# Altium PCB Insole_ver1_42.PcbDoc (part 2 of 3)
Units mm, origin at the board's own origin, x right, y up, seen from the top; angles counter-clockwise.
Board outline 154.9 x 260.57 mm, 2 copper layers (Top Layer, Bottom Layer); 254 components, 50 nets, 803 pads, 0 vias.
Unrouted connection lines stored in the file: 477.
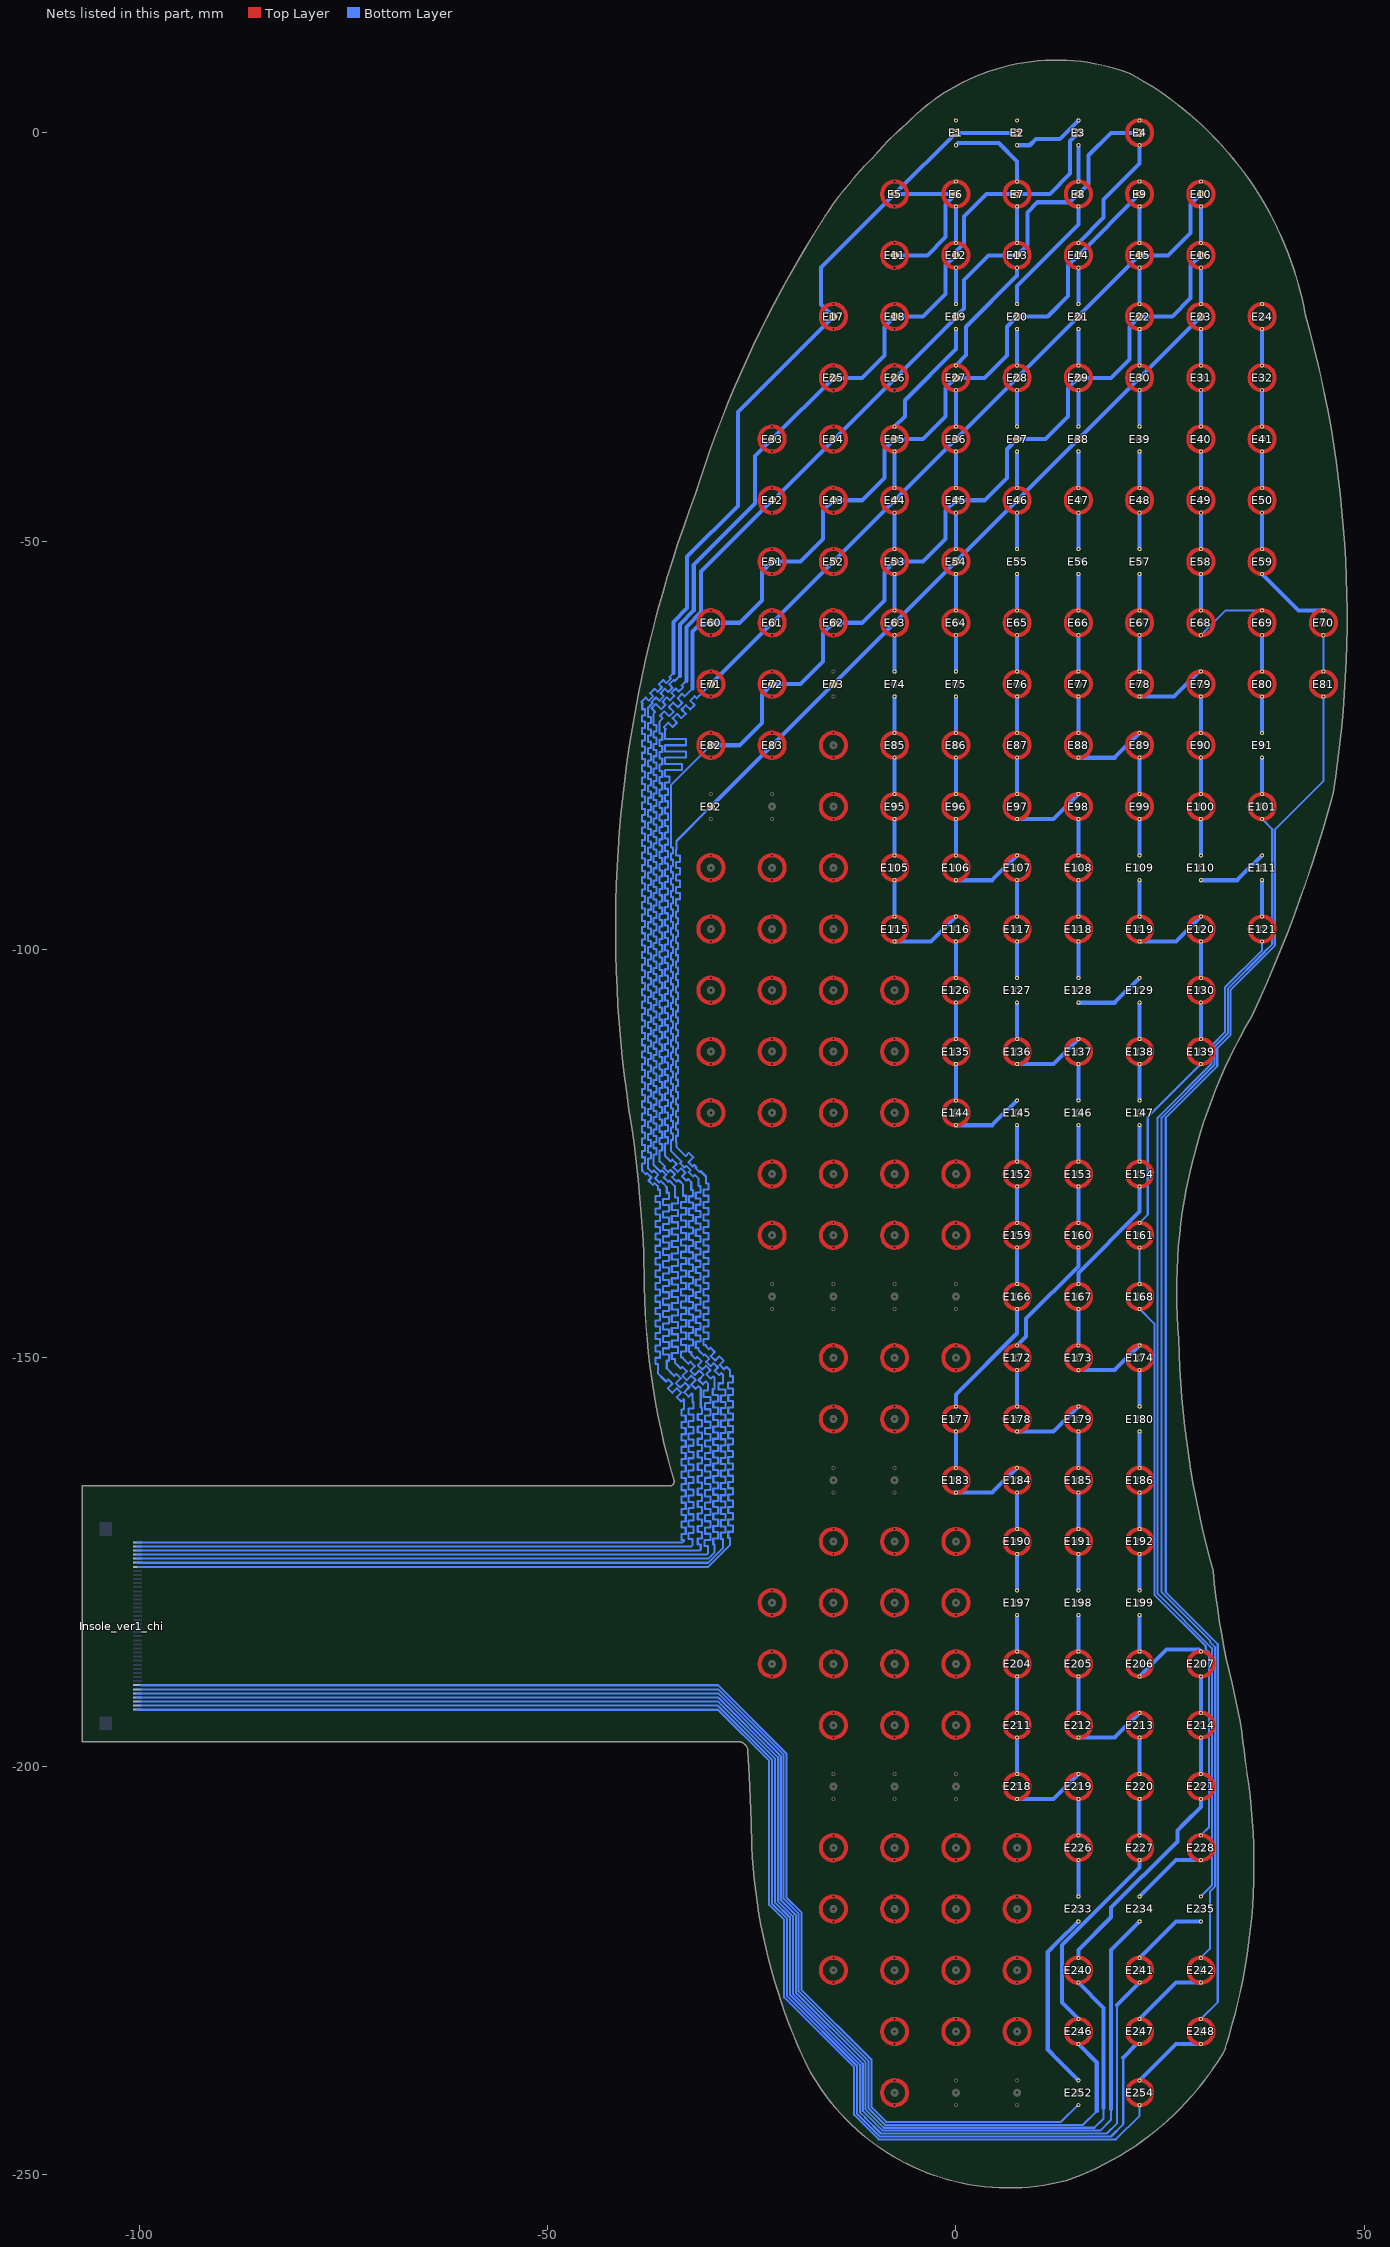
[diagram p2: the nets of this part, all layers, seen from the top]

## Nets (pads, with @x,y where several pads share a name; then routed paths per layer and width w, separated by ;. In a path a pad name is that pad's centre, name@x,y a point inside that pad or via, vN(x,y) a via of type N, cw(c..) or ccw(c..) an arc to the next point about the centre after c; other vN are vias at no path point) (continued)
Col4: E6.1 E12.1 E19.1 E35.1 E44.1 E53.1 E63.1 E74.1 E85.1 E95.1 E105.1 E115.1 E116.1 E126.1 E135.1 E144.1 E145.1 E152.1 E159.1 E166.1 E177.1 E183.1 E184.1 E190.1 E197.1 E204.1 E211.1 E218.1 E219.1 E226.1 E233.1 E252.1 Insole_ver1_chi.36 | length 351.6
  Bottom Layer w0.254: Insole_ver1_chi.36@-99.777,-190.1 -29.109,-190.1 -20.736,-198.473 -20.736,-216.102 -18.889,-217.949 -18.889,-227.431 -10.322,-235.998 -10.322,-241.789 -8.534,-243.577 12.88,-243.577 14.933,-241.524 E252.1@15,-241.524
  Bottom Layer w0.5: E115.1@-7.5,-99.024 -3.048,-99.024 E116.1@0,-95.976 ; E115.1@-7.5,-95.976 E105.1@-7.5,-91.524 ; E105.1@-7.5,-88.476 E95.1@-7.5,-84.024 ; E95.1@-7.5,-80.976 E85.1@-7.5,-76.524 ; E85.1@-7.5,-73.476 E74.1@-7.5,-69.024 ; E74.1@-7.5,-65.976 E63.1@-7.5,-61.524 ; E63.1@-7.5,-58.476 E53.1@-7.5,-54.024 ; E53.1@-7.5,-50.976 E44.1@-7.5,-46.524 ; E44.1@-7.5,-43.476 E35.1@-7.5,-39.024 ; E35.1@-7.5,-35.976 -6.25,-34.726 -6.25,-32.75 0,-26.5 E19.1@0,-24.024 ; E183.1@0,-166.524 4.452,-166.524 E184.1@7.5,-163.476 ; E183.1@0,-163.476 E177.1@0,-159.024 ; E177.1@0,-155.976 0,-154.5 7.5,-147 E166.1@7.5,-144.024 ; E144.1@0,-121.524 4.452,-121.524 E145.1@7.5,-118.476 ; E144.1@0,-118.476 E135.1@0,-114.024 ; E135.1@0,-110.976 E126.1@0,-106.524 ; E126.1@0,-103.476 E116.1@0,-99.024 ; E19.1@0,-20.976 E12.1@0,-16.524 ; E12.1@0,-13.476 E6.1@0,-9.024 ; E218.1@7.5,-204.024 11.952,-204.024 E219.1@15,-200.976 ; E218.1@7.5,-200.976 E211.1@7.5,-196.524 ; E211.1@7.5,-193.476 E204.1@7.5,-189.024 ; E204.1@7.5,-185.976 E197.1@7.5,-181.524 ; E197.1@7.5,-178.476 E190.1@7.5,-174.024 ; E190.1@7.5,-170.976 E184.1@7.5,-166.524 ; E166.1@7.5,-140.976 E159.1@7.5,-136.524 ; E159.1@7.5,-133.476 E152.1@7.5,-129.024 ; E152.1@7.5,-125.976 E145.1@7.5,-121.524 ; E252.1@15,-238.476 12.4,-235.876 11.25,-234.726 11.25,-222.774 12.4,-221.624 E233.1@15,-219.024 ; E233.1@15,-215.976 E226.1@15,-211.524 ; E226.1@15,-208.476 E219.1@15,-204.024
Col5: E1.1 E7.1 E13.1 E27.1 E36.1 E45.1 E54.1 E64.1 E75.1 E86.1 E96.1 E106.1 E107.1 E117.1 E127.1 E136.1 E137.1 E146.1 E153.1 E160.1 E172.1 E178.1 E179.1 E185.1 E191.1 E198.1 E205.1 E212.1 E213.1 E220.1 E227.1 E246.1 Insole_ver1_chi.37 | length 371
  Bottom Layer w0.254: Insole_ver1_chi.37@-99.777,-190.6 -99.303,-190.6 -99.297,-190.606 -29.106,-190.606 -21.092,-198.62 -21.092,-216.249 -19.245,-218.096 -19.245,-227.578 -10.686,-236.137 -10.686,-241.928 -8.681,-243.933 15.567,-243.933 17.25,-242.25
  Bottom Layer w0.5: E106.1@0,-91.524 4.452,-91.524 E107.1@7.5,-88.476 ; E106.1@0,-88.476 E96.1@0,-84.024 ; E96.1@0,-80.976 E86.1@0,-76.524 ; E86.1@0,-73.476 E75.1@0,-69.024 ; E75.1@0,-65.976 E64.1@0,-61.524 ; E64.1@0,-58.476 E54.1@0,-54.024 ; E54.1@0,-50.976 E45.1@0,-46.524 ; E45.1@0,-43.476 E36.1@0,-39.024 ; E36.1@0,-35.976 E27.1@0,-31.524 ; E27.1@0,-28.476 1.25,-27.226 1.25,-23.75 7.5,-17.5 E13.1@7.5,-16.524 ; E1.1@0,-1.524 0.274,-1.25 5.25,-1.25 7.5,-3.5 E7.1@7.5,-5.976 ; E178.1@7.5,-159.024 11.952,-159.024 E179.1@15,-155.976 ; E178.1@7.5,-155.976 E172.1@7.5,-151.524 ; E172.1@7.5,-148.476 8.6,-147.376 8.6,-145.2 15,-138.8 E160.1@15,-136.524 ; E136.1@7.5,-114.024 11.952,-114.024 E137.1@15,-110.976 ; E136.1@7.5,-110.976 E127.1@7.5,-106.524 ; E127.1@7.5,-103.476 E117.1@7.5,-99.024 ; E117.1@7.5,-95.976 E107.1@7.5,-91.524 ; E13.1@7.5,-13.476 E7.1@7.5,-9.024 ; E246.1@15,-234.024 17.25,-236.274 17.25,-242.25 ; E246.1@15,-230.976 13,-228.976 13,-221.916 22.5,-212.416 E227.1@22.5,-211.524 ; E212.1@15,-196.524 19.452,-196.524 E213.1@22.5,-193.476 ; E212.1@15,-193.476 E205.1@15,-189.024 ; E205.1@15,-185.976 E198.1@15,-181.524 ; E198.1@15,-178.476 E191.1@15,-174.024 ; E191.1@15,-170.976 E185.1@15,-166.524 ; E185.1@15,-163.476 E179.1@15,-159.024 ; E160.1@15,-133.476 E153.1@15,-129.024 ; E153.1@15,-125.976 E146.1@15,-121.524 ; E146.1@15,-118.476 E137.1@15,-114.024 ; E227.1@22.5,-208.476 E220.1@22.5,-204.024 ; E220.1@22.5,-200.976 E213.1@22.5,-196.524
Col6: E2.1 E3.1 E8.1 E20.1 E28.1 E37.1 E46.1 E55.1 E65.1 E76.1 E87.1 E97.1 E98.1 E108.1 E118.1 E128.1 E129.1 E138.1 E147.1 E154.1 E167.1 E173.1 E174.1 E180.1 E186.1 E192.1 E199.1 E206.1 E207.1 E214.1 E221.1 E240.1 Insole_ver1_chi.38 | length 380.2
  Bottom Layer w0.254: Insole_ver1_chi.38@-100.2,-191.1 -29.114,-191.1 -21.447,-198.767 -21.447,-216.397 -19.6,-218.243 -19.6,-227.726 -11.042,-236.284 -11.042,-242.076 -8.829,-244.289 16.961,-244.289 18.1,-243.15 18.1,-241.85 ; 27,-185.774 27,-185.75
  Bottom Layer w0.5: E97.1@7.5,-84.024 11.952,-84.024 E98.1@15,-80.976 ; E97.1@7.5,-80.976 E87.1@7.5,-76.524 ; E87.1@7.5,-73.476 E76.1@7.5,-69.024 ; E76.1@7.5,-65.976 E65.1@7.5,-61.524 ; E65.1@7.5,-58.476 E55.1@7.5,-54.024 ; E55.1@7.5,-50.976 E46.1@7.5,-46.524 ; E46.1@7.5,-43.476 E37.1@7.5,-39.024 ; E37.1@7.5,-35.976 E28.1@7.5,-31.524 ; E28.1@7.5,-28.476 E20.1@7.5,-24.024 ; E20.1@7.5,-20.976 7.5,-18.75 15,-11.25 E8.1@15,-9.024 ; E2.1@7.5,-1.524 9.048,-1.524 9.822,-0.75 12.726,-0.75 E3.1@15,1.524 ; E240.1@15,-226.524 18.1,-229.624 18.1,-241.85 ; E240.1@15,-223.476 15,-222.5 18.989,-218.511 18.989,-217.311 22.9,-213.4 22.982,-213.4 27.118,-209.265 27.118,-207.882 28,-207 30,-205 E221.1@30,-204.024 ; E173.1@15,-151.524 19.452,-151.524 E174.1@22.5,-148.476 ; E173.1@15,-148.476 E167.1@15,-144.024 ; E167.1@15,-140.976 15,-139.6 22.5,-132.1 E154.1@22.5,-129.024 ; E128.1@15,-106.524 19.452,-106.524 E129.1@22.5,-103.476 ; E128.1@15,-103.476 E118.1@15,-99.024 ; E118.1@15,-95.976 E108.1@15,-91.524 ; E108.1@15,-88.476 E98.1@15,-84.024 ; E8.1@15,-5.976 E3.1@15,-1.524 ; E206.1@22.5,-189.024 25.774,-185.75 27,-185.75 29.774,-185.75 E207.1@30,-185.976 ; E206.1@22.5,-185.976 E199.1@22.5,-181.524 ; E199.1@22.5,-178.476 E192.1@22.5,-174.024 ; E192.1@22.5,-170.976 E186.1@22.5,-166.524 ; E186.1@22.5,-163.476 E180.1@22.5,-159.024 ; E180.1@22.5,-155.976 E174.1@22.5,-151.524 ; E154.1@22.5,-125.976 E147.1@22.5,-121.524 ; E147.1@22.5,-118.476 E138.1@22.5,-114.024 ; E138.1@22.5,-110.976 E129.1@22.5,-106.524 ; E221.1@30,-200.976 E214.1@30,-196.524 ; E214.1@30,-193.476 E207.1@30,-189.024
Col7: E4.1 E14.1 E21.1 E29.1 E38.1 E47.1 E56.1 E66.1 E77.1 E88.1 E89.1 E99.1 E109.1 E119.1 E120.1 E130.1 E139.1 E161.1 E168.1 E228.1 E234.1 Insole_ver1_chi.39 | length 381.9
  Bottom Layer w0.254: Insole_ver1_chi.39@-100.2,-191.6 -29.117,-191.6 -21.803,-198.914 -21.803,-216.544 -19.956,-218.391 -19.956,-227.873 -11.4,-236.429 -11.4,-242.221 -8.976,-244.644 17.672,-244.644 19,-243.317 19,-242 ; E168.1@22.5,-144.024 24.3,-145.824 24.3,-179 30.6,-185.3 30.6,-185.684 31,-186.084 31,-207.476 E228.1@30,-208.476 ; E168.1@22.5,-140.976 E161.1@22.5,-136.524 ; E161.1@22.5,-133.476 23.5,-132.476 23.5,-120.524 E139.1@30,-114.024
  Bottom Layer w0.5: E88.1@15,-76.524 19.452,-76.524 E89.1@22.5,-73.476 ; E88.1@15,-73.476 E77.1@15,-69.024 ; E77.1@15,-65.976 E66.1@15,-61.524 ; E66.1@15,-58.476 E56.1@15,-54.024 ; E56.1@15,-50.976 E47.1@15,-46.524 ; E47.1@15,-43.476 E38.1@15,-39.024 ; E38.1@15,-35.976 E29.1@15,-31.524 ; E29.1@15,-28.476 E21.1@15,-24.024 ; E21.1@15,-20.976 E14.1@15,-16.524 ; E14.1@15,-13.476 18.1,-10.376 18.1,-8.15 22.5,-3.75 E4.1@22.5,-1.524 ; 19,-242 19,-222.524 E234.1@22.5,-219.024 ; E234.1@22.5,-215.976 26.952,-211.524 E228.1@30,-211.524 ; E119.1@22.5,-99.024 26.952,-99.024 E120.1@30,-95.976 ; E119.1@22.5,-95.976 E109.1@22.5,-91.524 ; E109.1@22.5,-88.476 E99.1@22.5,-84.024 ; E99.1@22.5,-80.976 E89.1@22.5,-76.524 ; E139.1@30,-110.976 E130.1@30,-106.524 ; E130.1@30,-103.476 E120.1@30,-99.024
Col8: E9.1 E15.1 E22.1 E30.1 E39.1 E48.1 E57.1 E67.1 E78.1 E79.1 E90.1 E100.1 E110.1 E111.1 E121.1 E235.1 E241.1 Insole_ver1_chi.40 | length 385.5
  Bottom Layer w0.254: Insole_ver1_chi.40@-99.777,-192.1 -99.325,-192.1 -29.12,-192.1 -22.158,-199.062 -22.158,-216.691 -20.312,-218.538 -20.312,-228.02 -11.755,-236.577 -11.755,-242.368 -11.1,-243.024 -11.1,-243.067 -9.167,-245 18.494,-245 19.75,-243.744 19.75,-229.274 ; E235.1@30,-215.976 31.356,-214.62 31.356,-185.553 24.7,-178.897 24.7,-120.6 31.3,-114 31.3,-111.797 32.944,-110.153 32.944,-104.656 37.5,-100.1 E121.1@37.5,-99.024
  Bottom Layer w0.5: 19.75,-229.274 E241.1@22.5,-226.524 ; E241.1@22.5,-223.476 26.952,-219.024 E235.1@30,-219.024 ; E78.1@22.5,-69.024 26.726,-69.024 29.774,-65.976 E79.1@30,-65.976 ; E78.1@22.5,-65.976 E67.1@22.5,-61.524 ; E67.1@22.5,-58.476 E57.1@22.5,-54.024 ; E57.1@22.5,-50.976 E48.1@22.5,-46.524 ; E48.1@22.5,-43.476 E39.1@22.5,-39.024 ; E39.1@22.5,-35.976 E30.1@22.5,-31.524 ; E30.1@22.5,-28.476 E22.1@22.5,-24.024 ; E22.1@22.5,-20.976 E15.1@22.5,-16.524 ; E15.1@22.5,-13.476 E9.1@22.5,-9.024 ; E110.1@30,-91.524 34.452,-91.524 E111.1@37.5,-88.476 ; E110.1@30,-88.476 E100.1@30,-84.024 ; E100.1@30,-80.976 E90.1@30,-76.524 ; E90.1@30,-73.476 E79.1@30,-69.024 ; E121.1@37.5,-95.976 E111.1@37.5,-91.524
Col9: E10.1 E16.1 E23.1 E31.1 E40.1 E49.1 E58.1 E68.1 E69.1 E80.1 E91.1 E101.1 E242.1 E247.1 Insole_ver1_chi.41 | length 384.5
  Bottom Layer w0.254: Insole_ver1_chi.41@-99.777,-192.6 -29.123,-192.6 -22.514,-199.209 -22.514,-216.838 -20.667,-218.685 -20.667,-228.168 -12.111,-236.724 -12.111,-242.559 -9.314,-245.355 18.995,-245.355 20.5,-243.85 20.5,-235.7 ; 22.146,-234.054 22.47,-234.054 E247.1@22.5,-234.024 ; E242.1@30,-223.476 31.1,-222.376 31.1,-215.379 31.711,-214.768 31.711,-185.405 31.1,-184.794 31.1,-184.6 25.2,-178.7 25.2,-120.603 31.656,-114.147 31.656,-111.944 33.3,-110.3 33.3,-104.803 37.856,-100.247 37.856,-100.244 38.744,-99.356 38.744,-85.268 E101.1@37.5,-84.024 ; E68.1@30,-61.524 33.048,-58.476 E69.1@37.5,-58.476
  Bottom Layer w0.5: 20.5,-235.7 22.146,-234.054 ; E247.1@22.5,-230.976 26.952,-226.524 E242.1@30,-226.524 ; E68.1@30,-58.476 E58.1@30,-54.024 ; E58.1@30,-50.976 E49.1@30,-46.524 ; E49.1@30,-43.476 E40.1@30,-39.024 ; E40.1@30,-35.976 E31.1@30,-31.524 ; E31.1@30,-28.476 E23.1@30,-24.024 ; E23.1@30,-20.976 E16.1@30,-16.524 ; E16.1@30,-13.476 E10.1@30,-9.024 ; E101.1@37.5,-80.976 E91.1@37.5,-76.524 ; E91.1@37.5,-73.476 E80.1@37.5,-69.024 ; E80.1@37.5,-65.976 E69.1@37.5,-61.524
Col10: E24.1 E32.1 E41.1 E50.1 E59.1 E70.1 E81.1 E248.1 E254.1 Insole_ver1_chi.42 | length 380.7
  Bottom Layer w0.254: Insole_ver1_chi.42@-100.2,-193.1 -29.126,-193.1 -22.87,-199.356 -22.87,-216.986 -21.023,-218.833 -21.023,-228.315 -12.466,-236.871 -12.466,-242.706 -9.462,-245.711 19.589,-245.711 22.5,-242.8 E254.1@22.5,-241.524 ; E248.1@30,-230.976 32.067,-228.909 32.067,-185.064 25.7,-178.697 25.7,-120.606 32.011,-114.295 32.011,-112.092 33.656,-110.447 33.656,-104.95 39.1,-99.506 39.1,-85.3 45,-79.4 E81.1@45,-69.024 ; E81.1@45,-65.976 E70.1@45,-61.524
  Bottom Layer w0.5: E254.1@22.5,-238.476 26.952,-234.024 E248.1@30,-234.024 ; E59.1@37.5,-54.024 41.952,-58.476 E70.1@45,-58.476 ; E59.1@37.5,-50.976 E50.1@37.5,-46.524 ; E50.1@37.5,-43.476 E41.1@37.5,-39.024 ; E41.1@37.5,-35.976 E32.1@37.5,-31.524 ; E32.1@37.5,-28.476 E24.1@37.5,-24.024
Col11: 
Col12: 
Col13: 
Col14: 
Col15: 
Col16: 
Col17: 
Col18: 
Row1: E1.0 E2.0 E5.0 E6.0 E11.0 E17.0 Insole_ver1_chi.1 | length 346.8
  Bottom Layer w0.254: Insole_ver1_chi.1@-100.2,-172.6 -98.97,-172.6 -33.449,-172.6 -33.3,-172.451 -33.3,-172.324 -33.6,-172.324 -33.6,-171.562 -33.079,-171.562 -33.079,-170.8 -33.6,-170.8 -33.6,-170.038 -33.079,-170.038 -33.079,-169.276 -33.6,-169.276 -33.6,-168.514 -33.079,-168.514 -33.079,-167.752 -33.6,-167.752 -33.6,-166.99 -33.079,-166.99 -33.079,-166.228 -33.6,-166.228 -33.6,-165.466 -33.079,-165.466 -33.079,-164.704 -33.6,-164.704 -33.6,-163.942 -33.079,-163.942 -33.079,-163.18 -33.6,-163.18 -33.6,-162.418 -33.079,-162.418 -33.079,-161.656 -33.6,-161.656 -33.6,-160.894 -33.079,-160.894 -33.079,-160.132 -33.6,-160.132 -33.6,-159.37 -33.079,-159.37 -33.079,-158.608 -33.6,-158.608 -33.6,-157.846 -33.079,-157.846 -33.079,-157.084 -33.6,-157.084 -33.6,-156.322 -33.3,-156.322 -33.3,-155.7 -33.3,-155.2 -33.3,-155.1 -33.34,-155.06 -33.643,-155.363 -34.182,-154.825 -33.625,-154.268 -34.164,-153.729 -34.721,-154.286 -35.26,-153.747 -34.703,-153.19 -35.241,-152.651 -35.495,-152.905 -35.8,-152.6 -36.5,-151.9 -36.5,-151.619 -36.5,-150.763 -36.763,-150.763 -36.763,-150.001 -36.229,-150.001 -36.229,-149.239 -36.763,-149.239 -36.763,-148.477 -36.229,-148.477 -36.229,-147.715 -36.763,-147.715 -36.763,-146.953 -36.229,-146.953 -36.229,-146.191 -36.763,-146.191 -36.763,-145.429 -36.229,-145.429 -36.229,-144.667 -36.763,-144.667 -36.763,-143.905 -36.229,-143.905 -36.229,-143.143 -36.763,-143.143 -36.763,-142.381 -36.229,-142.381 -36.229,-141.619 -36.763,-141.619 -36.763,-140.857 -36.229,-140.857 -36.229,-140.095 -36.763,-140.095 -36.763,-139.333 -36.229,-139.333 -36.229,-138.571 -36.763,-138.571 -36.763,-137.809 -36.229,-137.809 -36.229,-137.047 -36.763,-137.047 -36.763,-136.285 -36.229,-136.285 -36.229,-135.523 -36.763,-135.523 -36.763,-134.761 -36.229,-134.761 -36.229,-133.999 -36.763,-133.999 -36.763,-133.237 -36.229,-133.237 -36.229,-132.475 -36.763,-132.475 -36.763,-131.713 -36.229,-131.713 -36.229,-130.951 -36.763,-130.951 -36.763,-130.189 -36.229,-130.189 -36.229,-129.427 -36.5,-129.427 -36.5,-129.3 -36.5,-129 -36.57,-128.93 -36.883,-128.617 -37.095,-128.83 -37.634,-128.291 -37.267,-127.924 -37.806,-127.385 -37.96,-127.54 -38.05,-127.45 -38.4,-127.1 -38.4,-126.973 -38.417,-126.973 -38.417,-126.211 -38.056,-126.211 -38.056,-125.449 -38.417,-125.449 -38.417,-124.687 -38.056,-124.687 -38.056,-123.925 -38.417,-123.925 -38.417,-123.163 -38.056,-123.163 -38.056,-122.401 -38.417,-122.401 -38.417,-121.639 -38.056,-121.639 -38.056,-120.877 -38.417,-120.877 -38.417,-120.115 -38.056,-120.115 -38.056,-119.353 -38.417,-119.353 -38.417,-118.591 -38.056,-118.591 -38.056,-117.829 -38.417,-117.829 -38.417,-117.067 -38.056,-117.067 -38.056,-116.305 -38.417,-116.305 -38.417,-115.543 -38.056,-115.543 -38.056,-114.781 -38.417,-114.781 -38.417,-114.019 -38.056,-114.019 -38.056,-113.257 -38.417,-113.257 -38.417,-112.495 -38.056,-112.495 -38.056,-111.733 -38.417,-111.733 -38.417,-110.971 -38.056,-110.971 -38.056,-110.209 -38.417,-110.209 -38.417,-109.447 -38.056,-109.447 -38.056,-108.685 -38.417,-108.685 -38.417,-107.923 -38.056,-107.923 -38.056,-107.161 -38.417,-107.161 -38.417,-106.399 -38.056,-106.399 -38.056,-105.637 -38.417,-105.637 -38.417,-104.875 -38.056,-104.875 -38.056,-104.113 -38.417,-104.113 -38.417,-103.351 -38.056,-103.351 -38.056,-102.589 -38.417,-102.589 -38.417,-101.827 -38.056,-101.827 -38.056,-101.065 -38.417,-101.065 -38.417,-100.303 -38.056,-100.303 -38.056,-99.541 -38.417,-99.541 -38.417,-98.779 -38.056,-98.779 -38.056,-98.017 -38.417,-98.017 -38.417,-97.255 -38.056,-97.255 -38.056,-96.493 -38.417,-96.493 -38.417,-95.731 -38.056,-95.731 -38.056,-94.969 -38.417,-94.969 -38.417,-94.207 -38.056,-94.207 -38.056,-93.445 -38.417,-93.445 -38.417,-92.683 -38.056,-92.683 -38.056,-91.921 -38.417,-91.921 -38.417,-91.159 -38.056,-91.159 -38.056,-90.397 -38.417,-90.397 -38.417,-89.635 -38.056,-89.635 -38.056,-88.873 -38.417,-88.873 -38.417,-88.111 -38.056,-88.111 -38.056,-87.349 -38.417,-87.349 -38.417,-86.587 -38.056,-86.587 -38.056,-85.825 -38.417,-85.825 -38.417,-85.063 -38.056,-85.063 -38.056,-84.301 -38.417,-84.301 -38.417,-83.539 -38.056,-83.539 -38.056,-82.777 -38.417,-82.777 -38.417,-82.015 -38.056,-82.015 -38.056,-81.253 -38.417,-81.253 -38.417,-80.491 -38.056,-80.491 -38.056,-79.729 -38.417,-79.729 -38.417,-78.967 -38.056,-78.967 -38.056,-78.205 -38.417,-78.205 -38.417,-77.443 -38.056,-77.443 -38.056,-76.681 -38.417,-76.681 -38.417,-75.919 -38.056,-75.919 -38.056,-75.157 -38.417,-75.157 -38.417,-74.395 -38.056,-74.395 -38.056,-73.633 -38.417,-73.633 -38.417,-72.871 -38.056,-72.871 -38.056,-72.109 -38.417,-72.109 -38.417,-71.347 -38.056,-71.347 -38.056,-70.585 -38.4,-70.585 -38.4,-70.2 -38.4,-70 -38.4,-69.972 -38.324,-69.896 -38.517,-69.704 -37.978,-69.165 -37.603,-69.54 -37.064,-69.001 -37.439,-68.626 -36.9,-68.087 -36.525,-68.462 -35.987,-67.923 -36.361,-67.549 -35.822,-67.01 -35.448,-67.384 -34.909,-66.846 -35.091,-66.663 -34.6,-66.172 -34.6,-66.123
  Bottom Layer w0.5: -34.6,-66.172 -34.6,-59.9 -32.9,-58.2 -32.9,-51.9 -26.7,-45.7 -26.7,-34.2 E17.0@-15,-22.5 -16.5,-21 -16.5,-16.5 E5.0@-7.5,-7.5 E1.0@0,0 E2.0@7.5,0 ; E11.0@-7.5,-15 -3.5,-15 -1.25,-12.75 -1.25,-8.75 E6.0@0,-7.5
  Bottom Layer w0.508: E5.0@-7.5,-7.5 E6.0@0,-7.5
Row2: E3.0 E7.0 E12.0 E18.0 E25.0 E33.0 Insole_ver1_chi.2 | length 338.8
  Bottom Layer w0.254: Insole_ver1_chi.2@-100.2,-173.1 -98.97,-173.1 -32.385,-173.1 -32.236,-172.951 -32.236,-172.336 -32.236,-172.209 -32.724,-172.209 -32.724,-171.447 -32.102,-171.447 -32.102,-170.685 -32.724,-170.685 -32.724,-169.923 -32.102,-169.923 -32.102,-169.161 -32.724,-169.161 -32.724,-168.399 -32.102,-168.399 -32.102,-167.637 -32.724,-167.637 -32.724,-166.875 -32.102,-166.875 -32.102,-166.113 -32.724,-166.113 -32.724,-165.351 -32.102,-165.351 -32.102,-164.589 -32.724,-164.589 -32.724,-163.827 -32.102,-163.827 -32.102,-163.065 -32.724,-163.065 -32.724,-162.303 -32.102,-162.303 -32.102,-161.541 -32.724,-161.541 -32.724,-160.779 -32.102,-160.779 -32.102,-160.017 -32.724,-160.017 -32.724,-159.255 -32.102,-159.255 -32.102,-158.493 -32.724,-158.493 -32.724,-157.731 -32.102,-157.731 -32.102,-156.969 -32.743,-156.969 -32.743,-156.207 -32.102,-156.207 -32.102,-155.445 -32.236,-155.445 -32.236,-154.9 -32.236,-154.464 -32.326,-154.374 -32.732,-154.779 -33.27,-154.241 -32.613,-153.583 -33.151,-153.044 -33.748,-153.641 -34.287,-153.102 -33.69,-152.505 -34.229,-151.967 -34.481,-152.219 -34.7,-152 -35.4,-151.3 -35.4,-151 -35.4,-150.365 -35.145,-150.365 -35.145,-149.603 -35.873,-149.603 -35.873,-148.841 -35.145,-148.841 -35.145,-148.079 -35.873,-148.079 -35.873,-147.317 -35.145,-147.317 -35.145,-146.555 -35.873,-146.555 -35.873,-145.793 -35.145,-145.793 -35.145,-145.031 -35.873,-145.031 -35.873,-144.269 -35.145,-144.269 -35.145,-143.507 -35.873,-143.507 -35.873,-142.745 -35.145,-142.745 -35.145,-141.983 -35.873,-141.983 -35.873,-141.221 -35.145,-141.221 -35.145,-140.459 -35.873,-140.459 -35.873,-139.697 -35.145,-139.697 -35.145,-138.935 -35.873,-138.935 -35.873,-138.173 -35.145,-138.173 -35.145,-137.411 -35.873,-137.411 -35.873,-136.649 -35.145,-136.649 -35.145,-135.887 -35.873,-135.887 -35.873,-135.125 -35.145,-135.125 -35.145,-134.363 -35.873,-134.363 -35.873,-133.601 -35.145,-133.601 -35.145,-132.839 -35.873,-132.839 -35.873,-132.077 -35.145,-132.077 -35.145,-131.315 -35.873,-131.315 -35.873,-130.553 -35.145,-130.553 -35.145,-129.791 -35.4,-129.791 -35.4,-129.664 -35.4,-129.1 -35.85,-128.65 -36.133,-128.367 -36.3,-128.534 -36.838,-127.996 -36.449,-127.606 -36.988,-127.067 -37.21,-127.29 -37.3,-127.2 -37.7,-126.8 -37.7,-126.6 -37.7,-126.473 -37.7,-126.386 -37.7,-125.624 -37.356,-125.624 -37.356,-124.862 -37.7,-124.862 -37.7,-124.1 -37.356,-124.1 -37.356,-123.338 -37.7,-123.338 -37.7,-122.576 -37.356,-122.576 -37.356,-121.814 -37.7,-121.814 -37.7,-121.052 -37.356,-121.052 -37.356,-120.29 -37.7,-120.29 -37.7,-119.528 -37.356,-119.528 -37.356,-118.766 -37.7,-118.766 -37.7,-118.004 -37.356,-118.004 -37.356,-117.242 -37.7,-117.242 -37.7,-116.48 -37.356,-116.48 -37.356,-115.718 -37.7,-115.718 -37.7,-114.956 -37.356,-114.956 -37.356,-114.194 -37.7,-114.194 -37.7,-113.432 -37.356,-113.432 -37.356,-112.67 -37.7,-112.67 -37.7,-111.908 -37.356,-111.908 -37.356,-111.146 -37.7,-111.146 -37.7,-110.384 -37.356,-110.384 -37.356,-109.622 -37.7,-109.622 -37.7,-108.86 -37.356,-108.86 -37.356,-108.098 -37.7,-108.098 -37.7,-107.336 -37.356,-107.336 -37.356,-106.574 -37.7,-106.574 -37.7,-105.812 -37.356,-105.812 -37.356,-105.05 -37.7,-105.05 -37.7,-104.288 -37.356,-104.288 -37.356,-103.526 -37.7,-103.526 -37.7,-102.764 -37.356,-102.764 -37.356,-102.002 -37.7,-102.002 -37.7,-101.24 -37.356,-101.24 -37.356,-100.478 -37.7,-100.478 -37.7,-99.716 -37.356,-99.716 -37.356,-98.954 -37.7,-98.954 -37.7,-98.192 -37.356,-98.192 -37.356,-97.43 -37.7,-97.43 -37.7,-96.668 -37.356,-96.668 -37.356,-95.906 -37.7,-95.906 -37.7,-95.144 -37.356,-95.144 -37.356,-94.382 -37.7,-94.382 -37.7,-93.62 -37.356,-93.62 -37.356,-92.858 -37.7,-92.858 -37.7,-92.096 -37.356,-92.096 -37.356,-91.334 -37.7,-91.334 -37.7,-90.572 -37.356,-90.572 -37.356,-89.81 -37.7,-89.81 -37.7,-89.048 -37.356,-89.048 -37.356,-88.286 -37.7,-88.286 -37.7,-87.524 -37.356,-87.524 -37.356,-86.762 -37.7,-86.762 -37.7,-86 -37.356,-86 -37.356,-85.238 -37.7,-85.238 -37.7,-84.476 -37.356,-84.476 -37.356,-83.714 -37.7,-83.714 -37.7,-82.952 -37.356,-82.952 -37.356,-82.19 -37.7,-82.19 -37.7,-81.428 -37.356,-81.428 -37.356,-80.666 -37.7,-80.666 -37.7,-79.904 -37.356,-79.904 -37.356,-79.142 -37.7,-79.142 -37.7,-78.38 -37.356,-78.38 -37.356,-77.618 -37.7,-77.618 -37.7,-76.856 -37.356,-76.856 -37.356,-76.094 -37.7,-76.094 -37.7,-75.332 -37.356,-75.332 -37.356,-74.57 -37.7,-74.57 -37.7,-73.808 -37.356,-73.808 -37.356,-73.046 -37.7,-73.046 -37.7,-72.284 -37.356,-72.284 -37.356,-71.522 -37.7,-71.522 -37.7,-71.395 -37.7,-70.4 -37.123,-69.823 -37.253,-69.693 -36.714,-69.154 -36.316,-69.552 -35.777,-69.013 -36.175,-68.615 -35.636,-68.076 -35.238,-68.474 -34.699,-67.935 -35.098,-67.537 -34.559,-66.998 -34.429,-67.129 -33.8,-66.5
  Bottom Layer w0.5: -33.8,-66.5 -33.8,-60.2 -32.1,-58.5 -32.1,-52.9 -24.6,-45.4 -24.6,-39.6 E33.0@-22.5,-37.5 E25.0@-15,-30 -11.5,-30 -8.75,-27.25 -8.75,-23.75 E18.0@-7.5,-22.5 -4,-22.5 -1.25,-19.75 -1.25,-16.25 E12.0@0,-15 ; E12.0@0.096,-14.904 0.096,-14.447 1,-13.542 1,-10.25 3.75,-7.5 E7.0@7.5,-7.5 11.5,-7.5 14,-5 14,-1 E3.0@15,0
Row3: E4.0 E8.0 E13.0 E19.0 E26.0 E34.0 E42.0 Insole_ver1_chi.3 | length 338.5
  Bottom Layer w0.254: Insole_ver1_chi.3@-100.2,-173.6 -98.97,-173.6 -31.385,-173.6 -31.236,-173.451 -31.236,-173 -31.236,-172.873 -31.605,-172.873 -31.605,-172.111 -31.074,-172.111 -31.074,-171.349 -31.605,-171.349 -31.605,-170.587 -31.074,-170.587 -31.074,-169.825 -31.605,-169.825 -31.605,-169.063 -31.074,-169.063 -31.074,-168.301 -31.605,-168.301 -31.605,-167.539 -31.074,-167.539 -31.074,-166.777 -31.605,-166.777 -31.605,-166.015 -31.074,-166.015 -31.074,-165.253 -31.605,-165.253 -31.605,-164.491 -31.074,-164.491 -31.074,-163.729 -31.605,-163.729 -31.605,-162.967 -31.074,-162.967 -31.074,-162.205 -31.605,-162.205 -31.605,-161.443 -31.074,-161.443 -31.074,-160.681 -31.605,-160.681 -31.605,-159.919 -31.074,-159.919 -31.074,-159.157 -31.605,-159.157 -31.605,-158.395 -31.074,-158.395 -31.074,-157.633 -31.605,-157.633 -31.605,-156.871 -31.074,-156.871 -31.074,-156.109 -31.236,-156.109 -31.236,-155.223 -31.236,-153.764 -31.44,-153.56 -31.53,-153.47 -31.876,-153.817 -32.415,-153.278 -31.865,-152.729 -32.404,-152.19 -32.954,-152.739 -33.492,-152.2 -32.943,-151.651 -33.482,-151.112 -33.685,-151.315 -34.15,-150.85 -34.4,-150.6 -34.4,-150.3 -34.4,-150.173 -34.79,-150.173 -34.79,-149.411 -34.027,-149.411 -34.027,-148.649 -34.79,-148.649 -34.79,-147.887 -34.027,-147.887 -34.027,-147.125 -34.79,-147.125 -34.79,-146.363 -34.027,-146.363 -34.027,-145.601 -34.79,-145.601 -34.79,-144.839 -34.027,-144.839 -34.027,-144.077 -34.79,-144.077 -34.79,-143.315 -34.027,-143.315 -34.027,-142.553 -34.79,-142.553 -34.79,-141.791 -34.027,-141.791 -34.027,-141.029 -34.79,-141.029 -34.79,-140.267 -34.027,-140.267 -34.027,-139.505 -34.79,-139.505 -34.79,-138.743 -34.027,-138.743 -34.027,-137.981 -34.79,-137.981 -34.79,-137.219 -34.027,-137.219 -34.027,-136.457 -34.79,-136.457 -34.79,-135.695 -34.027,-135.695 -34.027,-134.933 -34.79,-134.933 -34.79,-134.171 -34.027,-134.171 -34.027,-133.409 -34.79,-133.409 -34.79,-132.647 -34.027,-132.647 -34.027,-131.885 -34.79,-131.885 -34.79,-131.123 -34.027,-131.123 -34.027,-130.361 -34.4,-130.361 -34.4,-129.5 -34.4,-129 -35,-128.4 -35.09,-128.31 -35.241,-128.462 -35.78,-127.923 -35.442,-127.584 -35.98,-127.046 -36.167,-127.233 -36.6,-126.8 -37,-126.4 -37,-126 -37,-125.111 -36.656,-125.111 -36.656,-124.349 -37,-124.349 -37,-123.587 -36.656,-123.587 -36.656,-122.825 -37,-122.825 -37,-122.063 -36.656,-122.063 -36.656,-121.301 -37,-121.301 -37,-120.539 -36.656,-120.539 -36.656,-119.777 -37,-119.777 -37,-119.015 -36.656,-119.015 -36.656,-118.253 -37,-118.253 -37,-117.491 -36.656,-117.491 -36.656,-116.729 -37,-116.729 -37,-115.967 -36.656,-115.967 -36.656,-115.205 -37,-115.205 -37,-114.443 -36.656,-114.443 -36.656,-113.681 -37,-113.681 -37,-112.919 -36.656,-112.919 -36.656,-112.157 -37,-112.157 -37,-111.395 -36.656,-111.395 -36.656,-110.633 -37,-110.633 -37,-109.871 -36.656,-109.871 -36.656,-109.109 -37,-109.109 -37,-108.347 -36.656,-108.347 -36.656,-107.585 -37,-107.585 -37,-106.823 -36.656,-106.823 -36.656,-106.061 -37,-106.061 -37,-105.299 -36.656,-105.299 -36.656,-104.537 -37,-104.537 -37,-103.775 -36.656,-103.775 -36.656,-103.013 -37,-103.013 -37,-102.251 -36.656,-102.251 -36.656,-101.489 -37,-101.489 -37,-100.727 -36.656,-100.727 -36.656,-99.965 -37,-99.965 -37,-99.203 -36.656,-99.203 -36.656,-98.441 -37,-98.441 -37,-97.679 -36.656,-97.679 -36.656,-96.917 -37,-96.917 -37,-96.155 -36.656,-96.155 -36.656,-95.393 -37,-95.393 -37,-94.631 -36.656,-94.631 -36.656,-93.869 -37,-93.869 -37,-93.107 -36.656,-93.107 -36.656,-92.345 -37,-92.345 -37,-91.583 -36.656,-91.583 -36.656,-90.821 -37,-90.821 -37,-90.059 -36.656,-90.059 -36.656,-89.297 -37,-89.297 -37,-88.535 -36.656,-88.535 -36.656,-87.773 -37,-87.773 -37,-87.011 -36.656,-87.011 -36.656,-86.249 -37,-86.249 -37,-85.487 -36.656,-85.487 -36.656,-84.725 -37,-84.725 -37,-83.963 -36.656,-83.963 -36.656,-83.201 -37,-83.201 -37,-82.439 -36.656,-82.439 -36.656,-81.677 -37,-81.677 -37,-80.915 -36.656,-80.915 -36.656,-80.153 -37,-80.153 -37,-79.391 -36.656,-79.391 -36.656,-78.629 -37,-78.629 -37,-77.867 -36.656,-77.867 -36.656,-77.105 -37,-77.105 -37,-76.343 -36.656,-76.343 -36.656,-75.581 -37,-75.581 -37,-74.819 -36.656,-74.819 -36.656,-74.057 -37,-74.057 -37,-73.295 -36.656,-73.295 -36.656,-72.533 -37,-72.533 -37,-71.5 -37,-71.1 -36.91,-71.01 -36.82,-70.92 -37.269,-70.472 -36.73,-69.933 -36.096,-70.567 -35.558,-70.028 -35.923,-69.662 -35.384,-69.123 -35.019,-69.489 -34.48,-68.95 -34.846,-68.585 -34.307,-68.046 -33.941,-68.411 -33.402,-67.873 -33.587,-67.687 -33.3,-67.4 -33,-67.1
  Bottom Layer w0.5: -33,-67.1 -33,-60.5 -31.2,-58.7 -31.2,-53.7 E42.0@-22.5,-45 ; -21.738,-44.365 E19.0@0.064,-22.564 ; E19.0@0,-22.5 1,-21.5 1,-18 4,-15 E13.0@7.5,-15 8.75,-13.75 8.75,-9.75 10,-8.5 14,-8.5 E8.0@15,-7.5 16.25,-6.25 16.25,-2.75 19,0 E4.0@22.5,0
Row4: E9.0 E14.0 E20.0 E27.0 E35.0 E43.0 E51.0 E60.0 Insole_ver1_chi.4 | length 342.8
  Bottom Layer w0.254: Insole_ver1_chi.4@-100.2,-174.1 -98.97,-174.1 -30.485,-174.1 -30.336,-173.951 -30.336,-173.2 -30.336,-173.073 -30.78,-173.073 -30.78,-172.311 -30.06,-172.311 -30.06,-171.549 -30.719,-171.549 -30.719,-170.787 -30.06,-170.787 -30.06,-170.025 -30.719,-170.025 -30.719,-169.263 -30.06,-169.263 -30.06,-168.501 -30.719,-168.501 -30.719,-167.739 -30.06,-167.739 -30.06,-166.977 -30.719,-166.977 -30.719,-166.215 -30.06,-166.215 -30.06,-165.453 -30.719,-165.453 -30.719,-164.691 -30.06,-164.691 -30.06,-163.929 -30.719,-163.929 -30.719,-163.167 -30.06,-163.167 -30.06,-162.405 -30.719,-162.405 -30.719,-161.643 -30.06,-161.643 -30.06,-160.881 -30.719,-160.881 -30.719,-160.119 -30.06,-160.119 -30.06,-159.357 -30.719,-159.357 -30.719,-158.595 -30.06,-158.595 -30.06,-157.833 -30.719,-157.833 -30.719,-157.071 -30.06,-157.071 -30.06,-156.309 -30.719,-156.309 -30.719,-155.547 -30.06,-155.547 -30.06,-154.785 -30.881,-154.785 -30.881,-154.023 -30.336,-154.023 -30.336,-153.6 -30.336,-153.164 -30.516,-152.984 -30.605,-152.895 -30.971,-153.26 -31.51,-152.721 -30.89,-152.102 -31.429,-151.563 -31.979,-152.112 -32.517,-151.574 -31.968,-151.024 -32.507,-150.485 -32.761,-150.739 -33.2,-150.3 -33.4,-150.1 -33.4,-149.973 -33.671,-149.973 -33.671,-149.211 -33.015,-149.211 -33.015,-148.449 -33.671,-148.449 -33.671,-147.687 -33.015,-147.687 -33.015,-146.925 -33.671,-146.925 -33.671,-146.163 -33.015,-146.163 -33.015,-145.401 -33.671,-145.401 -33.671,-144.639 -33.015,-144.639 -33.015,-143.877 -33.671,-143.877 -33.671,-143.115 -33.015,-143.115 -33.015,-142.353 -33.671,-142.353 -33.671,-141.591 -33.015,-141.591 -33.015,-140.829 -33.671,-140.829 -33.671,-140.067 -33.015,-140.067 -33.015,-139.305 -33.671,-139.305 -33.671,-138.543 -33.015,-138.543 -33.015,-137.781 -33.671,-137.781 -33.671,-137.019 -33.015,-137.019 -33.015,-136.257 -33.671,-136.257 -33.671,-135.495 -33.015,-135.495 -33.015,-134.733 -33.671,-134.733 -33.671,-133.971 -33.015,-133.971 -33.015,-133.209 -33.671,-133.209 -33.671,-132.447 -33.015,-132.447 -33.015,-131.685 -33.671,-131.685 -33.671,-130.923 -33.015,-130.923 -33.015,-130.161 -33.4,-130.161 -33.4,-129.8 -33.4,-128.8 -33.9,-128.3 -33.99,-128.21 -34.192,-128.412 -34.731,-127.873 -34.399,-127.542 -34.938,-127.003 -35.229,-127.294 -35.768,-126.755 -35.606,-126.594 -35.9,-126.3 -36.3,-125.9 -36.3,-125.5 -36.3,-124.611 -35.956,-124.611 -35.956,-123.849 -36.3,-123.849 -36.3,-123.087 -35.956,-123.087 -35.956,-122.325 -36.3,-122.325 -36.3,-121.563 -35.956,-121.563 -35.956,-120.801 -36.3,-120.801 -36.3,-120.039 -35.956,-120.039 -35.956,-119.277 -36.3,-119.277 -36.3,-118.515 -35.956,-118.515 -35.956,-117.753 -36.3,-117.753 -36.3,-116.991 -35.956,-116.991 -35.956,-116.229 -36.3,-116.229 -36.3,-115.467 -35.956,-115.467 -35.956,-114.705 -36.3,-114.705 -36.3,-113.943 -35.956,-113.943 -35.956,-113.181 -36.3,-113.181 -36.3,-112.419 -35.956,-112.419 -35.956,-111.657 -36.3,-111.657 -36.3,-110.895 -35.956,-110.895 -35.956,-110.133 -36.3,-110.133 -36.3,-109.371 -35.956,-109.371 -35.956,-108.609 -36.3,-108.609 -36.3,-107.847 -35.956,-107.847 -35.956,-107.085 -36.3,-107.085 -36.3,-106.323 -35.956,-106.323 -35.956,-105.561 -36.3,-105.561 -36.3,-104.799 -35.956,-104.799 -35.956,-104.037 -36.3,-104.037 -36.3,-103.275 -35.956,-103.275 -35.956,-102.513 -36.3,-102.513 -36.3,-101.751 -35.956,-101.751 -35.956,-100.989 -36.3,-100.989 -36.3,-100.227 -35.956,-100.227 -35.956,-99.465 -36.3,-99.465 -36.3,-98.703 -35.956,-98.703 -35.956,-97.941 -36.3,-97.941 -36.3,-97.179 -35.956,-97.179 -35.956,-96.417 -36.3,-96.417 -36.3,-95.655 -35.956,-95.655 -35.956,-94.893 -36.3,-94.893 -36.3,-94.131 -35.956,-94.131 -35.956,-93.369 -36.3,-93.369 -36.3,-92.607 -35.956,-92.607 -35.956,-91.845 -36.3,-91.845 -36.3,-91.083 -35.956,-91.083 -35.956,-90.321 -36.3,-90.321 -36.3,-89.559 -35.956,-89.559 -35.956,-88.797 -36.3,-88.797 -36.3,-88.035 -35.956,-88.035 -35.956,-87.273 -36.3,-87.273 -36.3,-86.511 -35.956,-86.511 -35.956,-85.749 -36.3,-85.749 -36.3,-84.987 -35.956,-84.987 -35.956,-84.225 -36.3,-84.225 -36.3,-83.463 -35.956,-83.463 -35.956,-82.701 -36.3,-82.701 -36.3,-81.939 -35.956,-81.939 -35.956,-81.177 -36.3,-81.177 -36.3,-80.415 -35.956,-80.415 -35.956,-79.653 -36.3,-79.653 -36.3,-78.891 -35.956,-78.891 -35.956,-78.129 -36.3,-78.129 -36.3,-77.367 -35.956,-77.367 -35.956,-76.605 -36.3,-76.605 -36.3,-75.843 -35.956,-75.843 -35.956,-75.081 -36.3,-75.081 -36.3,-74.319 -35.956,-74.319 -35.956,-73.557 -36.3,-73.557 -36.3,-72.533 -36.3,-72.1 -35.995,-71.795 -35.906,-71.706 -36.226,-71.385 -35.687,-70.846 -35.098,-71.435 -34.559,-70.896 -35.148,-70.307 -34.61,-69.769 -34.021,-70.358 -33.482,-69.819 -34.071,-69.23 -33.532,-68.691 -33.211,-69.011 -32.6,-68.4 -32.266,-68.066
  Bottom Layer w0.5: -32.266,-68.066 -32.266,-61.066 -31.296,-60.096 -30.096,-60.096 E60.0@-30,-60 -26.5,-60 -23.75,-57.25 -23.75,-53.75 E51.0@-22.5,-52.5 -19,-52.5 -16.25,-49.75 -16.25,-46.25 E43.0@-15,-45 -11.5,-45 -8.75,-42.25 -8.75,-38.75 E35.0@-7.5,-37.5 -4,-37.5 -1.25,-34.75 -1.25,-31.25 E27.0@0,-30 3.5,-30 6.25,-27.25 6.25,-23.75 E20.0@7.5,-22.5 11.25,-22.5 13.75,-20 13.75,-16.25 E14.0@15,-15 E9.0@22.5,-7.5
Row5: E10.0 E15.0 E21.0 E28.0 E36.0 E44.0 E52.0 E61.0 E71.0 Insole_ver1_chi.5 | length 340.3
  Bottom Layer w0.254: Insole_ver1_chi.5@-100.2,-174.6 -98.97,-174.6 -30.333,-174.6 -29.536,-173.803 -29.536,-173 -29.536,-172.873 -29.705,-172.873 -29.705,-172.111 -29.146,-172.111 -29.146,-171.349 -29.705,-171.349 -29.705,-170.587 -29.146,-170.587 -29.146,-169.825 -29.705,-169.825 -29.705,-169.063 -29.146,-169.063 -29.146,-168.301 -29.705,-168.301 -29.705,-167.539 -29.146,-167.539 -29.146,-166.777 -29.705,-166.777 -29.705,-166.015 -29.146,-166.015 -29.146,-165.253 -29.705,-165.253 -29.705,-164.491 -29.146,-164.491 -29.146,-163.729 -29.705,-163.729 -29.705,-162.967 -29.146,-162.967 -29.146,-162.205 -29.705,-162.205 -29.705,-161.443 -29.146,-161.443 -29.146,-160.681 -29.705,-160.681 -29.705,-159.919 -29.146,-159.919 -29.146,-159.157 -29.705,-159.157 -29.705,-158.395 -29.146,-158.395 -29.146,-157.633 -29.705,-157.633 -29.705,-156.871 -29.146,-156.871 -29.146,-156.109 -29.705,-156.109 -29.705,-155.347 -29.146,-155.347 -29.146,-154.585 -29.766,-154.585 -29.766,-153.823 -29.536,-153.823 -29.536,-153.2 -29.536,-152.464 -29.64,-152.36 -29.73,-152.27 -30.008,-152.549 -30.547,-152.01 -30.051,-151.514 -30.59,-150.975 -31.052,-151.437 -31.591,-150.899 -31.128,-150.436 -31.667,-149.897 -31.885,-150.115 -32.2,-149.8 -32.4,-149.6 -32.4,-149.4 -32.4,-149.273 -32.66,-149.273 -32.66,-148.511 -32.205,-148.511 -32.205,-147.749 -32.66,-147.749 -32.66,-146.987 -32.205,-146.987 -32.205,-146.225 -32.66,-146.225 -32.66,-145.463 -32.205,-145.463 -32.205,-144.701 -32.66,-144.701 -32.66,-143.939 -32.205,-143.939 -32.205,-143.177 -32.66,-143.177 -32.66,-142.415 -32.205,-142.415 -32.205,-141.653 -32.66,-141.653 -32.66,-140.891 -32.205,-140.891 -32.205,-140.129 -32.66,-140.129 -32.66,-139.367 -32.205,-139.367 -32.205,-138.605 -32.66,-138.605 -32.66,-137.843 -32.205,-137.843 -32.205,-137.081 -32.66,-137.081 -32.66,-136.319 -32.205,-136.319 -32.205,-135.557 -32.66,-135.557 -32.66,-134.795 -32.205,-134.795 -32.205,-134.033 -32.66,-134.033 -32.66,-133.271 -32.205,-133.271 -32.205,-132.509 -32.66,-132.509 -32.66,-131.747 -32.205,-131.747 -32.205,-130.985 -32.66,-130.985 -32.66,-130.223 -32.205,-130.223 -32.205,-129.461 -32.4,-129.461 -32.4,-129.2 -32.4,-128.5 -32.7,-128.2 -32.79,-128.11 -32.992,-128.312 -33.53,-127.773 -33.105,-127.348 -33.644,-126.809 -34.069,-127.234 -34.608,-126.696 -34.183,-126.27 -34.722,-125.732 -34.945,-125.955 -35.05,-125.85 -35.6,-125.3 -35.6,-124.649 -35.6,-124.522 -35.6,-123.76 -35.256,-123.76 -35.256,-122.998 -35.6,-122.998 -35.6,-122.236 -35.256,-122.236 -35.256,-121.474 -35.6,-121.474 -35.6,-120.712 -35.256,-120.712 -35.256,-119.95 -35.6,-119.95 -35.6,-119.188 -35.256,-119.188 -35.256,-118.426 -35.6,-118.426 -35.6,-117.664 -35.256,-117.664 -35.256,-116.902 -35.6,-116.902 -35.6,-116.14 -35.256,-116.14 -35.256,-115.378 -35.6,-115.378 -35.6,-114.616 -35.256,-114.616 -35.256,-113.854 -35.6,-113.854 -35.6,-113.092 -35.256,-113.092 -35.256,-112.33 -35.6,-112.33 -35.6,-111.568 -35.256,-111.568 -35.256,-110.806 -35.6,-110.806 -35.6,-110.044 -35.256,-110.044 -35.256,-109.282 -35.6,-109.282 -35.6,-108.52 -35.256,-108.52 -35.256,-107.758 -35.6,-107.758 -35.6,-106.996 -35.256,-106.996 -35.256,-106.234 -35.6,-106.234 -35.6,-105.472 -35.256,-105.472 -35.256,-104.71 -35.6,-104.71 -35.6,-103.948 -35.256,-103.948 -35.256,-103.186 -35.6,-103.186 -35.6,-102.424 -35.256,-102.424 -35.256,-101.662 -35.6,-101.662 -35.6,-100.9 -35.256,-100.9 -35.256,-100.138 -35.6,-100.138 -35.6,-99.376 -35.256,-99.376 -35.256,-98.614 -35.6,-98.614 -35.6,-97.852 -35.256,-97.852 -35.256,-97.09 -35.6,-97.09 -35.6,-96.328 -35.256,-96.328 -35.256,-95.566 -35.6,-95.566 -35.6,-94.804 -35.256,-94.804 -35.256,-94.042 -35.6,-94.042 -35.6,-93.28 -35.256,-93.28 -35.256,-92.518 -35.6,-92.518 -35.6,-91.756 -35.256,-91.756 -35.256,-90.994 -35.6,-90.994 -35.6,-90.232 -35.256,-90.232 -35.256,-89.47 -35.6,-89.47 -35.6,-88.708 -35.256,-88.708 -35.256,-87.946 -35.6,-87.946 -35.6,-87.184 -35.256,-87.184 -35.256,-86.422 -35.6,-86.422 -35.6,-85.66 -35.256,-85.66 -35.256,-84.898 -35.6,-84.898 -35.6,-84.136 -35.256,-84.136 -35.256,-83.374 -35.6,-83.374 -35.6,-82.612 -35.256,-82.612 -35.256,-81.85 -35.6,-81.85 -35.6,-81.088 -35.256,-81.088 -35.256,-80.326 -35.6,-80.326 -35.6,-79.564 -35.067,-79.564 -35.067,-78.802 -35.6,-78.802 -35.6,-78.04 -33.543,-78.04 -33.543,-77.278 -35.6,-77.278 -35.6,-76.516 -33.06,-76.516 -33.06,-75.754 -35.6,-75.754 -35.6,-74.992 -33.06,-74.992 -33.06,-74.23 -35.6,-74.23 -35.6,-73.727 -35.6,-73.6 -35.6,-73.1 -35.51,-73.01 -35.752,-72.769 -35.213,-72.23 -34.683,-72.76 -34.144,-72.221 -34.674,-71.691 -34.135,-71.152 -33.605,-71.682 -33.066,-71.143 -33.596,-70.613 -33.058,-70.075 -32.528,-70.605 -31.989,-70.066 -32.519,-69.536 -31.98,-68.997 -31.738,-69.238 -31.494,-68.994 E71.0@-30,-67.5 ; 22.144,-15.356 E15.0@22.647,-15.356
  Bottom Layer w0.5: E71.0@-30,-67.5 E61.0@-22.5,-60 E52.0@-15,-52.5 E44.0@-7.5,-45 E36.0@0,-37.5 E28.0@7.5,-30 22.144,-15.356 ; E15.0@22.5,-15 26,-15 28.75,-12.25 28.75,-8.75 E10.0@30,-7.5
Row6: E16.0 E22.0 E29.0 E37.0 E45.0 E53.0 E62.0 E72.0 E82.0 Insole_ver1_chi.6 | length 323.4
  Bottom Layer w0.254: Insole_ver1_chi.6@-100.2,-175.1 -98.97,-175.1 -30.33,-175.1 -28.536,-173.306 -28.536,-172.3 -28.536,-172.173 -28.791,-172.173 -28.791,-171.411 -28.231,-171.411 -28.231,-170.649 -28.791,-170.649 -28.791,-169.887 -28.231,-169.887 -28.231,-169.125 -28.791,-169.125 -28.791,-168.363 -28.231,-168.363 -28.231,-167.601 -28.791,-167.601 -28.791,-166.839 -28.231,-166.839 -28.231,-166.077 -28.791,-166.077 -28.791,-165.315 -28.231,-165.315 -28.231,-164.553 -28.791,-164.553 -28.791,-163.791 -28.231,-163.791 -28.231,-163.029 -28.791,-163.029 -28.791,-162.267 -28.231,-162.267 -28.231,-161.505 -28.791,-161.505 -28.791,-160.743 -28.231,-160.743 -28.231,-159.981 -28.791,-159.981 -28.791,-159.219 -28.231,-159.219 -28.231,-158.457 -28.791,-158.457 -28.791,-157.695 -28.231,-157.695 -28.231,-156.933 -28.791,-156.933 -28.791,-156.171 -28.231,-156.171 -28.231,-155.409 -28.791,-155.409 -28.791,-154.647 -28.231,-154.647 -28.231,-153.885 -29.042,-153.885 -29.042,-153.123 -28.536,-153.123 -28.536,-152.3 -28.536,-152.064 -28.638,-151.962 -28.728,-151.872 -28.986,-152.13 -29.525,-151.591 -29.126,-151.193 -29.665,-150.654 -30.036,-151.025 -30.575,-150.487 -30.203,-150.115 -30.742,-149.576 -30.883,-149.717 -31.3,-149.3 -31.5,-149.1 -31.5,-148.918 -31.5,-148.791 -31.85,-148.791 -31.85,-148.029 -31.267,-148.029 -31.267,-147.267 -31.85,-147.267 -31.85,-146.505 -31.267,-146.505 -31.267,-145.743 -31.85,-145.743 -31.85,-144.981 -31.267,-144.981 -31.267,-144.219 -31.85,-144.219 -31.85,-143.457 -31.267,-143.457 -31.267,-142.695 -31.85,-142.695 -31.85,-141.933 -31.267,-141.933 -31.267,-141.171 -31.85,-141.171 -31.85,-140.409 -31.267,-140.409 -31.267,-139.647 -31.85,-139.647 -31.85,-138.885 -31.267,-138.885 -31.267,-138.123 -31.85,-138.123 -31.85,-137.361 -31.267,-137.361 -31.267,-136.599 -31.85,-136.599 -31.85,-135.837 -31.267,-135.837 -31.267,-135.075 -31.85,-135.075 -31.85,-134.313 -31.267,-134.313 -31.267,-133.551 -31.85,-133.551 -31.85,-132.789 -31.267,-132.789 -31.267,-132.027 -31.85,-132.027 -31.85,-131.265 -31.267,-131.265 -31.267,-130.503 -31.85,-130.503 -31.85,-129.741 -31.267,-129.741 -31.267,-128.979 -31.5,-128.979 -31.5,-128.6 -31.5,-128.071 -31.875,-127.696 -31.965,-127.606 -32.177,-127.818 -32.716,-127.279 -32.479,-127.042 -33.017,-126.503 -33.233,-126.718 -33.771,-126.179 -33.581,-125.989 -34.185,-125.385 -34.9,-124.671 -34.9,-124.2 -34.9,-123.311 -34.626,-123.311 -34.626,-122.549 -34.9,-122.549 -34.9,-121.787 -34.626,-121.787 -34.626,-121.025 -34.9,-121.025 -34.9,-120.263 -34.626,-120.263 -34.626,-119.501 -34.9,-119.501 -34.9,-118.739 -34.626,-118.739 -34.626,-117.977 -34.9,-117.977 -34.9,-117.215 -34.626,-117.215 -34.626,-116.453 -34.9,-116.453 -34.9,-115.691 -34.626,-115.691 -34.626,-114.929 -34.9,-114.929 -34.9,-114.167 -34.626,-114.167 -34.626,-113.405 -34.9,-113.405 -34.9,-112.643 -34.626,-112.643 -34.626,-111.881 -34.9,-111.881 -34.9,-111.119 -34.626,-111.119 -34.626,-110.357 -34.9,-110.357 -34.9,-109.595 -34.626,-109.595 -34.626,-108.833 -34.9,-108.833 -34.9,-108.071 -34.626,-108.071 -34.626,-107.309 -34.9,-107.309 -34.9,-106.547 -34.626,-106.547 -34.626,-105.785 -34.9,-105.785 -34.9,-105.023 -34.626,-105.023 -34.626,-104.261 -34.9,-104.261 -34.9,-103.499 -34.626,-103.499 -34.626,-102.737 -34.9,-102.737 -34.9,-101.975 -34.626,-101.975 -34.626,-101.213 -34.9,-101.213 -34.9,-100.451 -34.626,-100.451 -34.626,-99.689 -34.9,-99.689 -34.9,-98.927 -34.626,-98.927 -34.626,-98.165 -34.9,-98.165 -34.9,-97.403 -34.626,-97.403 -34.626,-96.641 -34.9,-96.641 -34.9,-95.879 -34.626,-95.879 -34.626,-95.117 -34.9,-95.117 -34.9,-94.355 -34.626,-94.355 -34.626,-93.593 -34.9,-93.593 -34.9,-92.831 -34.626,-92.831 -34.626,-92.069 -34.9,-92.069 -34.9,-91.307 -34.626,-91.307 -34.626,-90.545 -34.9,-90.545 -34.9,-89.783 -34.626,-89.783 -34.626,-89.021 -34.9,-89.021 -34.9,-88.259 -34.626,-88.259 -34.626,-87.497 -34.9,-87.497 -34.9,-86.5 -34.9,-79.9 E82.0@-30,-75
  Bottom Layer w0.5: E82.0@-30,-75 -26.5,-75 -23.75,-72.25 -23.75,-68.75 E72.0@-22.5,-67.5 -19,-67.5 -16.25,-64.75 -16.25,-61.25 E62.0@-15,-60 -11.5,-60 -8.75,-57.25 -8.75,-53.75 E53.0@-7.5,-52.5 -4,-52.5 -1.25,-49.75 -1.25,-46.25 E45.0@0,-45 3.5,-45 6.25,-42.25 6.25,-38.75 E37.0@7.5,-37.5 11,-37.5 13.75,-34.75 13.75,-31.25 E29.0@15,-30 19,-30 21.25,-27.75 21.25,-23.75 E22.0@22.5,-22.5 26.5,-22.5 28.75,-20.25 28.75,-16.25 E16.0@30,-15
Row7: E23.0 E30.0 E38.0 E46.0 E54.0 E63.0 E73.0 E83.0 E92.0 Insole_ver1_chi.7 | length 304.2
  Bottom Layer w0.254: Insole_ver1_chi.7@-100.2,-175.6 -98.97,-175.6 -30.328,-175.6 -27.636,-172.909 -27.636,-172.2 -27.636,-172.073 -27.875,-172.073 -27.875,-171.311 -27.282,-171.311 -27.282,-170.549 -27.875,-170.549 -27.875,-169.787 -27.282,-169.787 -27.282,-169.025 -27.875,-169.025 -27.875,-168.263 -27.282,-168.263 -27.282,-167.501 -27.875,-167.501 -27.875,-166.739 -27.282,-166.739 -27.282,-165.977 -27.875,-165.977 -27.875,-165.215 -27.282,-165.215 -27.282,-164.453 -27.875,-164.453 -27.875,-163.691 -27.282,-163.691 -27.282,-162.929 -27.875,-162.929 -27.875,-162.167 -27.282,-162.167 -27.282,-161.405 -27.875,-161.405 -27.875,-160.643 -27.282,-160.643 -27.282,-159.881 -27.875,-159.881 -27.875,-159.119 -27.282,-159.119 -27.282,-158.357 -27.875,-158.357 -27.875,-157.595 -27.282,-157.595 -27.282,-156.833 -27.875,-156.833 -27.875,-156.071 -27.282,-156.071 -27.282,-155.309 -27.875,-155.309 -27.875,-154.547 -27.282,-154.547 -27.282,-153.785 -27.89,-153.785 -27.89,-153.023 -27.282,-153.023 -27.282,-152.261 -27.636,-152.261 -27.636,-151.9 -27.636,-151.564 -28,-151.2 -28.09,-151.11 -28.398,-151.418 -28.936,-150.879 -28.43,-150.373 -28.969,-149.834 -29.475,-150.34 -30.014,-149.801 -29.508,-149.295 -30.046,-148.756 -30.245,-148.955 -30.595,-148.605 -30.6,-148.6 -30.6,-148.575 -30.6,-148.448 -30.912,-148.448 -30.912,-147.686 -30.286,-147.686 -30.286,-146.924 -30.912,-146.924 -30.912,-146.162 -30.286,-146.162 -30.286,-145.4 -30.912,-145.4 -30.912,-144.638 -30.286,-144.638 -30.286,-143.876 -30.912,-143.876 -30.912,-143.114 -30.286,-143.114 -30.286,-142.352 -30.912,-142.352 -30.912,-141.59 -30.286,-141.59 -30.286,-140.828 -30.912,-140.828 -30.912,-140.066 -30.286,-140.066 -30.286,-139.304 -30.912,-139.304 -30.912,-138.542 -30.286,-138.542 -30.286,-137.78 -30.912,-137.78 -30.912,-137.018 -30.286,-137.018 -30.286,-136.256 -30.912,-136.256 -30.912,-135.494 -30.286,-135.494 -30.286,-134.732 -30.912,-134.732 -30.912,-133.97 -30.286,-133.97 -30.286,-133.208 -30.912,-133.208 -30.912,-132.446 -30.286,-132.446 -30.286,-131.684 -30.912,-131.684 -30.912,-130.922 -30.286,-130.922 -30.286,-130.16 -30.912,-130.16 -30.912,-129.398 -30.286,-129.398 -30.286,-128.636 -30.6,-128.636 -30.6,-128.2 -30.6,-127.8 -31.15,-127.25 -31.24,-127.16 -31.358,-127.279 -31.897,-126.74 -31.779,-126.621 -31.918,-126.482 -32.008,-126.392 -32.201,-126.585 -32.74,-126.046 -32.149,-125.454 -32.687,-124.916 -33.086,-125.314 -33.45,-124.95 -34.2,-124.2 -34.2,-123.7 -34.2,-123.573 -34.27,-123.573 -34.27,-122.811 -34,-122.811 -34,-122.049 -34.27,-122.049 -34.27,-121.287 -34,-121.287 -34,-120.525 -34.27,-120.525 -34.27,-119.763 -34,-119.763 -34,-119.001 -34.27,-119.001 -34.27,-118.239 -34,-118.239 -34,-117.477 -34.27,-117.477 -34.27,-116.715 -34,-116.715 -34,-115.953 -34.27,-115.953 -34.27,-115.191 -34,-115.191 -34,-114.429 -34.27,-114.429 -34.27,-113.667 -34,-113.667 -34,-112.905 -34.27,-112.905 -34.27,-112.143 -34,-112.143 -34,-111.381 -34.27,-111.381 -34.27,-110.619 -34,-110.619 -34,-109.857 -34.27,-109.857 -34.27,-109.095 -34,-109.095 -34,-108.333 -34.27,-108.333 -34.27,-107.571 -34,-107.571 -34,-106.809 -34.27,-106.809 -34.27,-106.047 -34,-106.047 -34,-105.285 -34.27,-105.285 -34.27,-104.523 -34,-104.523 -34,-103.761 -34.27,-103.761 -34.27,-102.999 -34,-102.999 -34,-102.237 -34.27,-102.237 -34.27,-101.475 -34,-101.475 -34,-100.713 -34.27,-100.713 -34.27,-99.951 -34,-99.951 -34,-99.189 -34.27,-99.189 -34.27,-98.427 -34,-98.427 -34,-97.665 -34.27,-97.665 -34.27,-96.903 -34,-96.903 -34,-96.141 -34.27,-96.141 -34.27,-95.379 -34,-95.379 -34,-94.617 -34.27,-94.617 -34.27,-93.855 -33.796,-93.855 -33.796,-93.093 -34.27,-93.093 -34.27,-92.331 -33.796,-92.331 -33.796,-91.569 -34.27,-91.569 -34.27,-90.807 -33.796,-90.807 -33.796,-90.045 -34.27,-90.045 -34.27,-89.283 -33.796,-89.283 -33.796,-88.521 -34.27,-88.521 -34.27,-87.759 -34.215,-87.759 -34.215,-87.4 -34.215,-86.715 E92.0@-30,-82.5
  Bottom Layer w0.5: E92.0@-30,-82.5 E83.0@-22.5,-75 E73.0@-15,-67.5 E63.0@-7.5,-60 E54.0@0,-52.5 E46.0@7.5,-45 E23.0@30,-22.5